# EAGLE board Node (EAGLE 9.5.2)
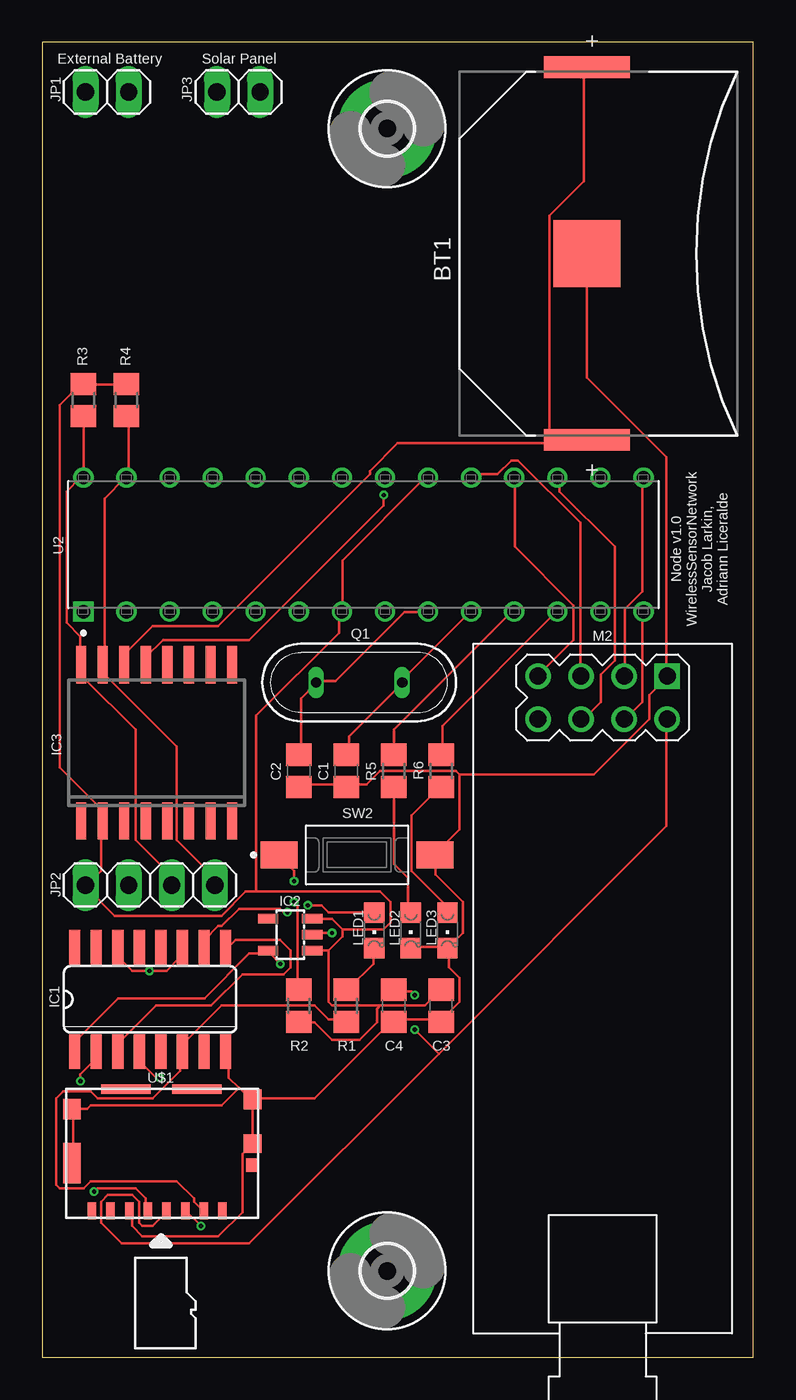
[diagram p0: board, top side]
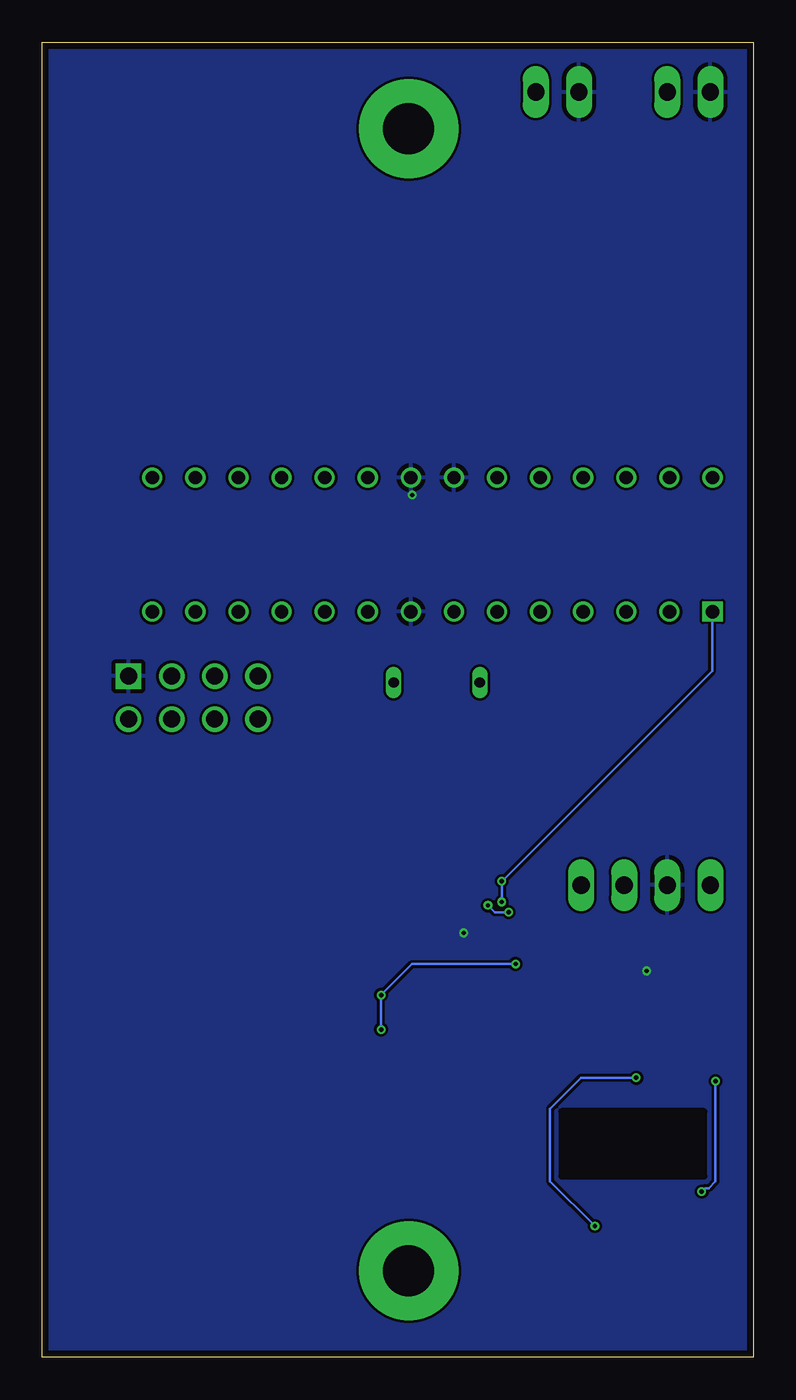
[diagram p1: board, bottom side, seen from below]

Size 41.91 x 77.47 mm. Coordinates in mm from the lower left corner, seen from the top.
Outline: 0,0 41.91,0 41.91,77.47 0,77.47 0,0
Copper layers (1*16): Top 0.035559375mm / dielectric 1.6mm / Bottom 0.035559375mm
Design rules "oshpark-2layer": minimum track width 6mil, minimum drill 10mil, track to track 6mil, track to pad 6mil, pad to pad 6mil, via to via 6mil, smd to smd 6mil, copper to edge 15mil, drill to drill 6mil, minimum pad ring 5mil, minimum via ring 5mil, stop-mask expansion 2.5mil, vias tented up to drill 0mil, thermal gap 10mil

## Footprints (pad centres in the part's own frame; a part is rotated, then mirrored left to right if it is on the bottom)
KEYSTONE_ELECTRONICS_3034_0 = smd 3.96 x 3.96: 1 0,-0.67 | smd 1.27 x 5.08: 2 -10.985,-0.67; 2-2 10.985,-0.67
C0805 = smd 1.3 x 1.5: 1 -0.95,0; 2 0.95,0
3,0-PAD = drill 3 pad 5.842: B3,0 0,0
SO16 = smd 0.66 x 2.032: 1 -4.445,-3.073; 2 -3.175,-3.073; 3 -1.905,-3.073; 4 -0.635,-3.073; 5 0.635,-3.073; 6 1.905,-3.073; 7 3.175,-3.073; 8 4.445,-3.073; 9 4.445,3.073; 10 3.175,3.073; 11 1.905,3.073; 12 0.635,3.073; 13 -0.635,3.073; 14 -1.905,3.073; 15 -3.175,3.073; 16 -4.445,3.073
SOT23-5L = smd 0.55 x 1.2: 1 -0.95,-1.3; 2 0,-1.3; 3 0.95,-1.3; 4 0.95,1.3; 5 -0.95,1.3
SO16W = smd 0.6 x 2.2: 1 -4.445,-4.6; 2 -3.175,-4.6; 3 -1.905,-4.6; 4 -0.635,-4.6; 5 0.635,-4.6; 6 1.905,-4.6; 7 3.175,-4.6; 8 4.445,-4.6; 9 4.445,4.6; 10 3.175,4.6; 11 1.905,4.6; 12 0.635,4.6; 13 -0.635,4.6; 14 -1.905,4.6; 15 -3.175,4.6; 16 -4.445,4.6
1X02 = drill 1.016 long: 1 -1.27,0; 2 1.27,0
1X04 = drill 1.016 long: 1 -3.81,0; 2 -1.27,0; 3 1.27,0; 4 3.81,0
CHIPLED_0805 = smd 1.2 x 1.2: A 0,-1.05; C 0,1.05
WIRELESS-NRF24L01-PA-EXT = drill 1 square: 1 -18.415,3.81 | drill 1: 2 -15.875,3.81; 3 -18.415,1.27; 4 -15.875,1.27; 5 -18.415,-1.27; 6 -15.875,-1.27; 7 -18.415,-3.81; 8 -15.875,-3.81
QS = drill 0.61 long: 1 -2.54,0; 2 2.54,0
R0805 = smd 1.3 x 1.5: 1 -0.95,0; 2 0.95,0
FSMSM = smd 2.18 x 1.6: 1 -4.6,0; 2 4.6,0
DIP-28 = drill 0.79 pad 1.19 square: 1 -3.95,16.51 | drill 0.79 pad 1.19: 2 -3.95,13.97; 3 -3.95,11.43; 4 -3.95,8.89; 5 -3.95,6.35; 6 -3.95,3.81; 7 -3.95,1.27; 8 -3.95,-1.27; 9 -3.95,-3.81; 10 -3.95,-6.35; 11 -3.95,-8.89; 12 -3.95,-11.43; 13 -3.95,-13.97; 14 -3.95,-16.51; 15 3.95,-16.51; 16 3.95,-13.97; 17 3.95,-11.43; 18 3.95,-8.89; 19 3.95,-6.35; 20 3.95,-3.81; 21 3.95,-1.27; 22 3.95,1.27; 23 3.95,3.81; 24 3.95,6.35; 25 3.95,8.89; 26 3.95,11.43; 27 3.95,13.97; 28 3.95,16.51
1051620001_SMT = smd 0.5 x 1: 1 -3.632,3.818; 2 -2.532,3.818; 3 -1.432,3.818; 4 -0.332,3.818; 5 0.768,3.818; 6 1.868,3.818; 7 2.968,3.813; 8 4.068,3.818 | smd 0.72 x 0.78: 9 -5.392,1.138 | smd 1.05 x 1.08: G1 -5.407,-0.132 | smd 1.05 x 1.2: G2 -5.407,-2.742; G3 5.243,-2.172 | smd 1.05 x 2.39: G4 5.243,1.013 | smd 2.91 x 0.55: NC1 2.063,-3.342; NC2 -2.127,-3.342

## Placement (x,y rotation side)
BT1  KEYSTONE_ELECTRONICS_3034KEYSTONE_ELECTRONICS_3034_0_0  [KEYSTONE_ELECTRONICS_3034_0]  32.77,65.02 270 top
C1  22pF  [C0805]  17.91,34.54 270 top
C2  22pF  [C0805]  15.11,34.54 270 top
C3  .1uF  [C0805]  23.5,20.7 270 top
C4  .1uF  [C0805]  20.7,20.7 270 top
H1  MOUNT-PAD-ROUND3.0  [3,0-PAD]  20.32,5.08 0 top
H2  MOUNT-PAD-ROUND3.0  [3,0-PAD]  20.32,72.39 0 top
IC1  4050D  [SO16]  6.35,21.08 0 top
IC2  LP298XS  [SOT23-5L]  14.61,24.89 90 top
IC3  DS3231/SO  [SO16W]  6.73,36.2 0 top
JP1  [1X02]  3.81,74.55 180 top
JP2  [1X04]  6.35,27.81 180 top
JP3  [1X02]  11.56,74.55 180 top
LED1  RED  [CHIPLED_0805]  19.56,25.15 180 top
LED2  GREEN  [CHIPLED_0805]  21.72,25.15 180 top
LED3  Yellow  [CHIPLED_0805]  23.88,25.15 180 top
M2  WIRELESS-NRF24L01-PA-EXT  [WIRELESS-NRF24L01-PA-EXT]  33.02,21.72 270 top
Q1  16MHz  [QS]  18.67,39.75 180 top
R1  1K  [R0805]  17.91,20.7 90 top
R2  10K  [R0805]  15.11,20.7 270 top
R3  10K  [R0805]  2.41,56.39 90 top
R4  10K  [R0805]  4.95,56.39 90 top
R5  1K  [R0805]  20.7,34.54 90 top
R6  1K  [R0805]  23.5,34.54 90 top
SW2  FSMSM  [FSMSM]  18.54,29.59 0 top
U2  ATMEGA328P-PU  [DIP-28]  18.92,47.88 90 top
U$1  1051620001A  [1051620001_SMT]  6.99,12.45 180 top

## Library data of the parts
BT1 = Keystone Electronics - 3034; AUTOMOTIVE: No; CENTROID_NOT_SPECIFIED: No; CONTACT_MATERIAL: Nickel; DATASHEET: https://www.keyelco.com/product-pdf.cfm?p=798; DEVICE_CLASS_L1: Connectors; DEVICE_CLASS_L2: unset; DEVICE_CLASS_L3: unset; DIGIKEY_DESCRIPTION: BATTERY RETAINER COIN 20MM SMD; DIGIKEY_PART_NUMBER: 36-3034-ND; FOOTPRINT_VARIANT_NAME_0: Recommended_Land_Pattern; HEIGHT: 4.31mm; LEAD_FREE: Yes; MF: Keystone Electronics; MFG_PACKAGE_IDENT: 3034; MFG_PACKAGE_IDENT_DATE: 0; MFG_PACKAGE_IDENT_REV: 0; MOUSER_DESCRIPTION: Coin Cell Battery Holders COIN CELL RETAINER; MOUSER_PART_NUMBER: 534-3034; MPN: 3034; NUMBER_OF_CONTACTS: 2; PACKAGE: SMT_COIN_CELL; PREFIX: BT; ROHS: Yes; VERIFICATION_VERSION: 0.0.0.2
C1-C4 = rcl; SPICEPREFIX: C
H1 H2 = holes
IC1 = 40xx
IC2 IC3 = adafruit
JP1 = pinhead; PIN1: GND; PIN2: +5V
JP2 = pinhead; PIN1: +5V; PIN2: GND; PIN3: SCL; PIN4: SDA
JP3 = pinhead; PIN1: GND; PIN2: +V
LED1-LED3 = led
M2 = diy-modules
Q1 = special
R1-R6 = rcl; SPICEPREFIX: R
SW2 = Switch; CREATED_BY: PCBLayout.com; DIGIKEY_PART_NUMBER: 450-1140-ND; MANUFACTURER: TE Connectivity ALCOSWITCH Switches; MPN: FSMSM
U2 = Microcontroller; CREATED_BY: PCBLayout.com; DIGIKEY_PART_NUMBER: ATMEGA328P-PU-ND; MANUFACTURER: Microchip Technology; MPN: ATMEGA328P-PU; PACKAGE: DIP-28
U$1 = Molex_micro_SD

## Nets
32KHZ: IC3.1
!RTC_RST: IC3.4
+3V3: C4.1 IC1.1 IC2.5 M2.2 U$1.4
+5V: C3.1 IC2.1 IC2.3 IC3.2 JP2.4 R2.2 R3.2 R4.2 U2.7 U2.20
CE: M2.3 U2.15
CLK: IC1.3 IC1.9
CS: IC1.7
CSN: M2.4 U2.14
DI: IC1.5
DO: U$1.7
GND: BT1.1 C1.2 C2.2 C3.2 C4.2 IC1.8 IC1.11 IC1.14 IC2.2 IC3.13 JP1.2 JP2.3 JP3.2 LED2.C LED3.C M2.1 SW2.2 U2.8 U2.21 U2.22 U$1.6 U$1.G1 U$1.G2 U$1.G3 U$1.G4
MISO: M2.7 U2.18
MOSI: M2.6 U2.17
N$1: IC1.10 LED1.A
N$2: IC1.2 U$1.5
N$3: IC1.6 R1.1 U$1.2
N$4: LED1.C R1.2
N$5: IC1.4 U$1.3
N$6: R2.1 SW2.1 U2.1
N$7: C1.1 Q1.1 U2.10
N$8: C2.1 Q1.2 U2.9
N$9: R5.2 U2.11
N$10: LED2.A R5.1
N$11: LED3.A R6.1
N$12: R6.2 U2.12
SCK: M2.5 U2.19
SCL: IC3.16 JP2.2 R3.1 U2.28
SDA: IC3.15 JP2.1 R4.1 U2.27
SQW: IC3.3
V_PACK: JP1.1
VBAT: BT1.2 BT1.2-2 IC3.14

## Tracks (layer width: path | path; a pad name or v marks a point on that pad's centre or on a via)
+3V3  (via drill 0.25)
  Top 0.152: IC1.1 2.03,18.09 2.03,18.69 4.47,21.13 9.55,21.13 12.19,23.77 13.21,23.77 IC2.5 13.41,23.77 v14.02,23.16 | 23.37,17.88 36.78,31.29 36.78,37.59 M2.2 | 23.37,17.88 12.19,6.71 4.67,6.71 3.45,7.92 3.45,9.14 3.86,9.55 5.28,9.55 5.69,9.14 5.69,7.92 5.89,7.72 6.5,7.72 7.32,8.53 U$1.4 | v21.95,21.34 21.74,21.54 20.73,21.54 C4.1 | 23.37,17.88 v21.95,19.3
  Bottom 0.152: v21.95,19.3 v21.95,21.34 20.12,23.16 v14.02,23.16
+5V
  Top 0.152: U2.20 22.55,51.82 17.68,46.94 17.68,44.09 U2.7 17.48,43.89 17.48,42.67 12.6,37.8 12.6,27.43 | 16.87,23.98 16.05,23.98 IC2.1 | 16.87,23.98 17.68,24.79 17.68,25.2 | 17.68,25.2 17.07,25.81 16.05,25.81 IC2.3 | 19.91,20.73 19.71,20.52 19.71,19.71 18.69,18.69 17.07,18.69 16.05,19.71 15.24,19.71 R2.2 | 19.91,20.73 22.55,20.73 23.37,21.54 C3.1 | 16.87,23.98 16.87,20.93 17.07,20.73 19.91,20.73 | R4.2 4.88,57.3 2.44,57.3 R3.2 2.23,57.3 1.02,56.08 1.02,34.75 3.45,32.31 3.45,31.7 IC3.2 3.45,31.5 3.45,28.65 2.64,27.84 JP2.4 2.64,27.64 4.27,26.01 10.57,26.01 11.99,27.43 12.6,27.43 | 17.68,25.2 20.12,25.2 20.52,25.6 20.52,26.82 19.91,27.43 12.6,27.43
CE
  Top 0.152: U2.15 35.36,51.82 35.36,45.11 34.34,44.09 34.34,40.23 M2.3
CLK
  Top 0.152: IC1.3 4.47,18.09 4.47,18.49 6.71,20.73 9.96,20.73 11.79,22.55 14.22,22.55 14.63,22.96 14.63,23.98 14.02,24.59 11.38,24.59 10.97,24.18 IC1.9
CSN
  Top 0.152: U2.14 35.36,43.89 35.36,38.61 34.34,37.59 M2.4
GND  (via drill 0.25)
  Top 0.152: U$1.G4 1.83,11.58 1.83,14.43 U$1.G3 1.83,14.63 2.64,14.63 2.85,14.83 10.57,14.83 11.58,15.85 | U$1.6 5.28,8.53 5.28,7.72 5.89,7.11 10.36,7.11 11.79,8.53 11.79,11.99 12.19,12.39 U$1.G1 12.39,12.6 12.39,15.04 U$1.G2 | 11.58,15.85 12.19,15.24 U$1.G2 | 11.58,15.85 10.97,16.46 10.97,17.88 IC1.8 | C2.2 15.24,33.73 17.88,33.73 C1.2 18.09,33.73 19.1,33.73 19.91,34.54 24.38,34.54 24.59,34.34 | LED2.C 21.74,24.18 23.77,24.18 LED3.C | LED3.C 23.98,23.98 23.98,22.96 24.59,22.35 24.59,20.93 23.57,19.91 C3.2 23.37,19.91 20.73,19.91 C4.2 20.52,19.71 16.05,15.24 12.39,15.24 U$1.G2 | LED3.C 23.98,24.18 24.79,24.99 24.79,26.82 23.16,28.45 23.16,29.46 SW2.2 23.16,29.67 24.59,31.09 24.59,34.34 | IC1.14 4.47,23.98 4.47,23.57 5.28,22.76 v6.3,22.76 7.32,22.76 8.13,23.57 8.13,23.98 IC1.11 | v17.07,24.99 16.05,24.99 IC2.2 | v20.12,50.8 20.12,50.19 12.19,42.27 7.11,42.27 6.1,41.25 IC3.13 | BT1.1 32.11,57.71 36.78,53.03 36.78,40.23 M2.1 36.78,40.03 35.76,39.01 35.76,37.59 32.51,34.34 24.59,34.34
  pour Bottom: 0,77.47 0,0 41.91,0 41.91,77.47
MISO
  Top 0.152: U2.18 27.84,51.82 27.84,47.75 31.29,44.3 31.29,42.27 29.26,40.23 M2.7
MOSI
  Top 0.152: U2.17 30.48,51.82 30.48,51 33.73,47.75 33.73,41.05 32.92,40.23 32.92,38.61 31.9,37.59 M2.6
N$1  (via drill 0.25)
  Top 0.152: v15.65,26.62 16.46,26.62 16.87,26.21 19.51,26.21 LED1.A | v14.43,26.21 14.22,26.21 14.02,26.42 11.58,26.42 10.57,25.4 10.36,25.4 9.55,24.59 9.55,24.18 IC1.10
  Bottom 0.152: v15.65,26.62 15.24,26.21 v14.43,26.21
N$2  (via drill 0.25)
  Top 0.152: v3.05,9.75 3.25,9.96 5.49,9.96 6.1,9.35 6.1,8.74 U$1.5 | v2.23,16.26 2.23,16.66 3.05,17.48 3.05,17.88 IC1.2
  Bottom 0.152: v3.05,9.75 2.85,9.96 2.64,9.96 2.23,10.36 v2.23,16.26
N$3
  Top 0.152: U$1.2 9.35,8.74 8.94,9.14 8.94,9.35 7.92,10.36 2.85,10.36 2.44,9.96 1.02,9.96 0.81,10.16 0.81,15.24 1.22,15.65 2.85,15.65 3.25,15.24 6.5,15.24 8.13,16.87 8.13,17.88 IC1.6 8.33,18.09 8.33,18.49 10.57,20.73 16.05,20.73 16.87,19.91 17.88,19.91 R1.1
N$4
  Top 0.152: LED1.C 19.51,23.98 19.51,23.16 18.09,21.74 R1.2
N$5  (via drill 0.25)
  Top 0.152: v9.35,7.72 8.53,8.53 U$1.3 | v6.91,16.46 6.71,16.46 5.89,17.27 5.89,17.88 IC1.4
  Bottom 0.152: v9.35,7.72 11.99,10.36 11.99,14.63 10.16,16.46 v6.91,16.46
N$6  (via drill 0.25)
  Top 0.152: v14.83,26.82 15.04,26.62 15.04,21.74 R2.1 | v14.83,28.04 14.83,28.65 14.02,29.46 SW2.1
  Bottom 0.152: v14.83,26.82 v14.83,28.04 2.44,40.44 2.44,43.89 U2.1
N$7
  Top 0.152: C1.1 18.09,35.56 18.09,36.58 21.13,39.62 Q1.1 21.13,39.83 25.2,43.89 U2.10
N$8
  Top 0.152: C2.1 15.24,35.56 15.24,38.81 16.05,39.62 Q1.2 16.26,39.83 17.27,39.83 21.34,43.89 22.55,43.89 U2.9
N$9
  Top 0.152: R5.2 20.73,35.56 20.73,36.98 27.64,43.89 U2.11
N$10
  Top 0.152: LED2.A 21.54,26.21 21.54,28.25 20.73,29.06 20.73,33.53 R5.1
N$11
  Top 0.152: LED3.A 23.77,26.21 23.77,26.62 21.74,28.65 21.74,31.9 23.37,33.53 R6.1
N$12
  Top 0.152: R6.2 23.57,35.56 23.57,37.19 30.28,43.89 U2.12
SCK
  Top 0.152: U2.19 25.4,52.02 26.82,52.02 27.64,52.83 28.04,52.83 31.7,49.17 31.7,40.23 M2.5
SCL
  Top 0.152: R3.1 2.44,55.27 2.44,52.02 U2.28 2.23,51.82 1.42,51 1.42,43.28 2.23,42.47 2.23,40.84 IC3.16 2.44,40.64 2.44,40.03 5.49,36.98 5.49,30.48 7.52,28.45 7.52,27.84 JP2.2
SDA
  Top 0.152: R4.1 5.08,55.27 5.08,52.02 U2.27 4.88,51.82 3.66,50.6 3.66,40.84 IC3.15 3.66,40.64 3.66,40.23 7.92,35.97 7.92,30.48 10.16,28.25 JP2.1
VBAT
  Top 0.152: 29.87,53.85 31.9,53.85 BT1.2-2 29.87,53.85 | 29.87,53.85 20.93,53.85 19.3,52.22 19.3,52.02 10.36,43.08 6.5,43.08 4.88,41.45 4.88,40.84 IC3.14 | 29.87,53.85 29.87,67.26 31.9,69.29 31.9,76 BT1.2

## Text on the board
tPlace: External Battery | Solar Panel | Node v1.0 / WirelessSensorNetwork / Jacob Larkin, / Adriann Liceralde